# Altium PCB WiirdFlex Bottom Alignment.PcbDoc
Units mm, origin at the board's own origin, x right, y up, seen from the top; angles counter-clockwise.
Board outline 74.5 x 98.5 mm, 2 copper layers (Top Layer, Bottom Layer); 21 components, 14 nets, 169 pads, 0 vias.
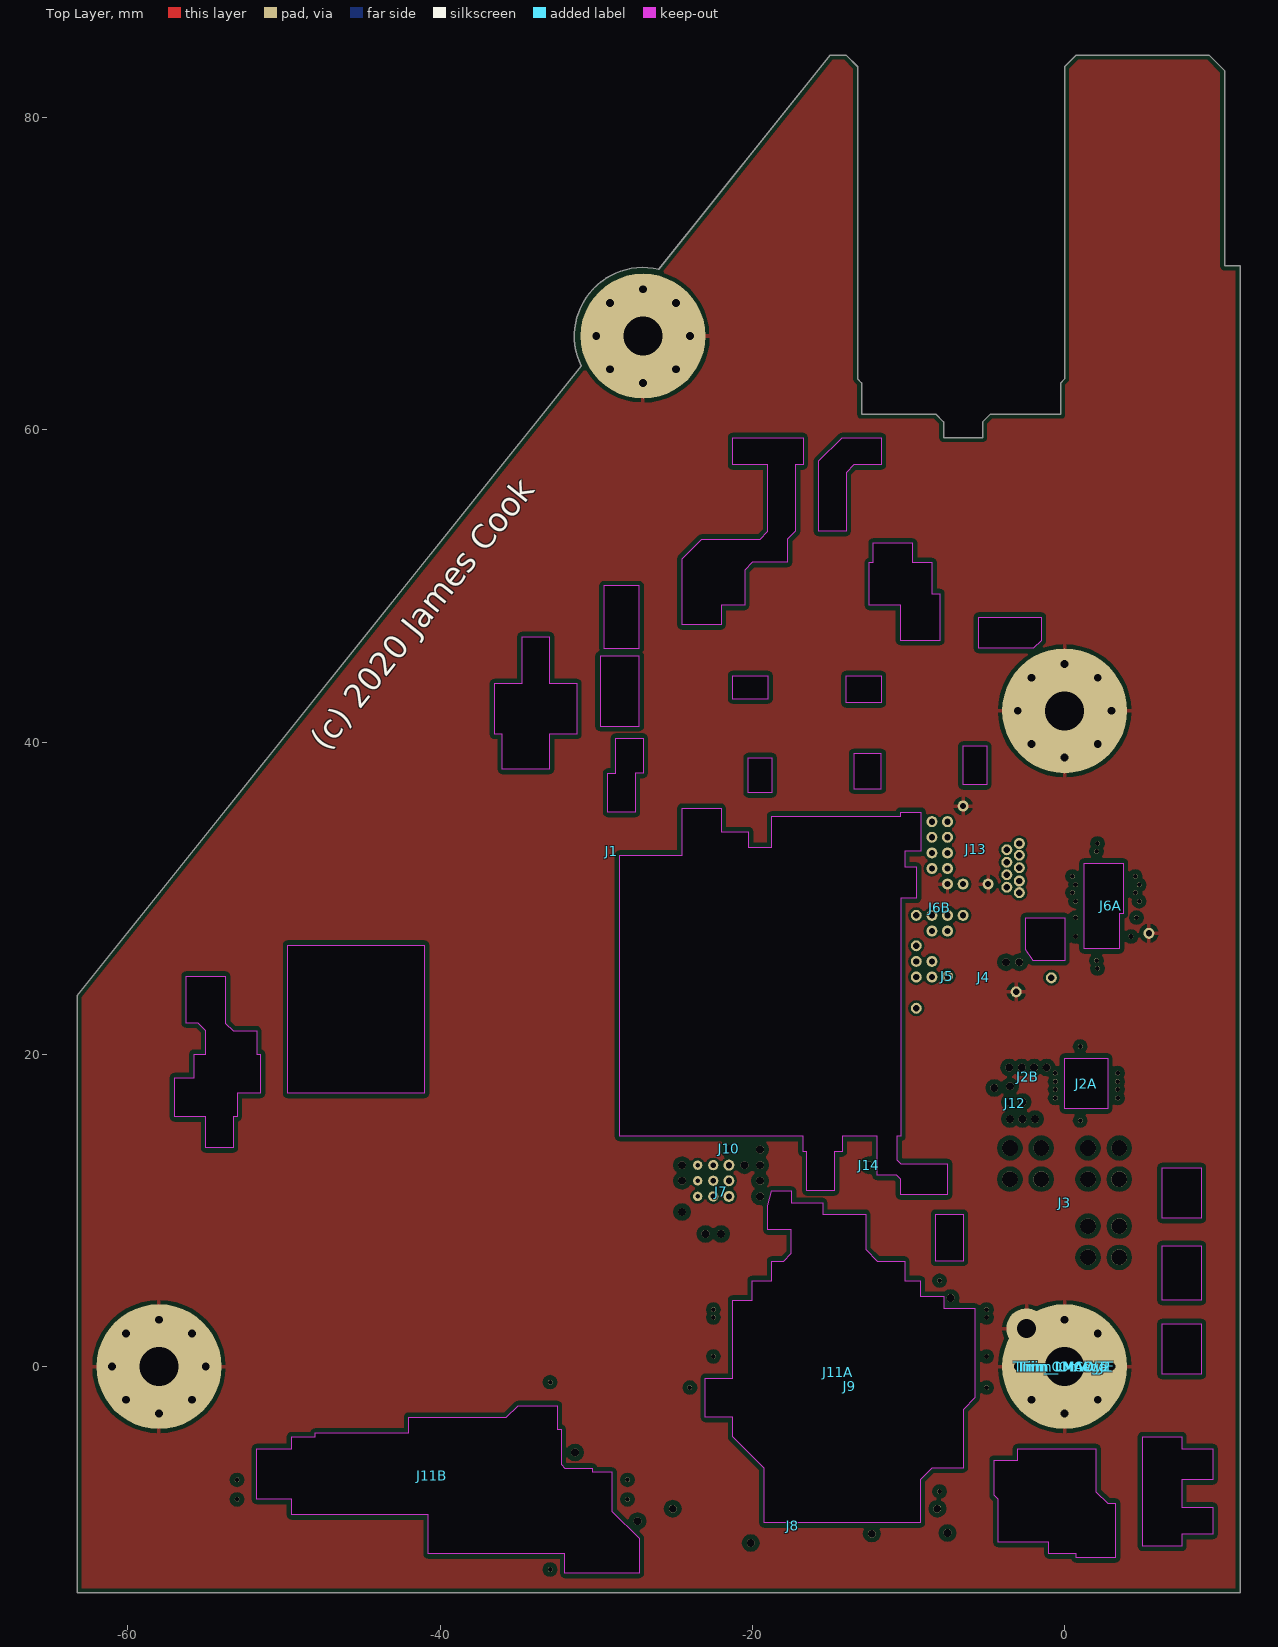
[diagram p0: Top Layer view]
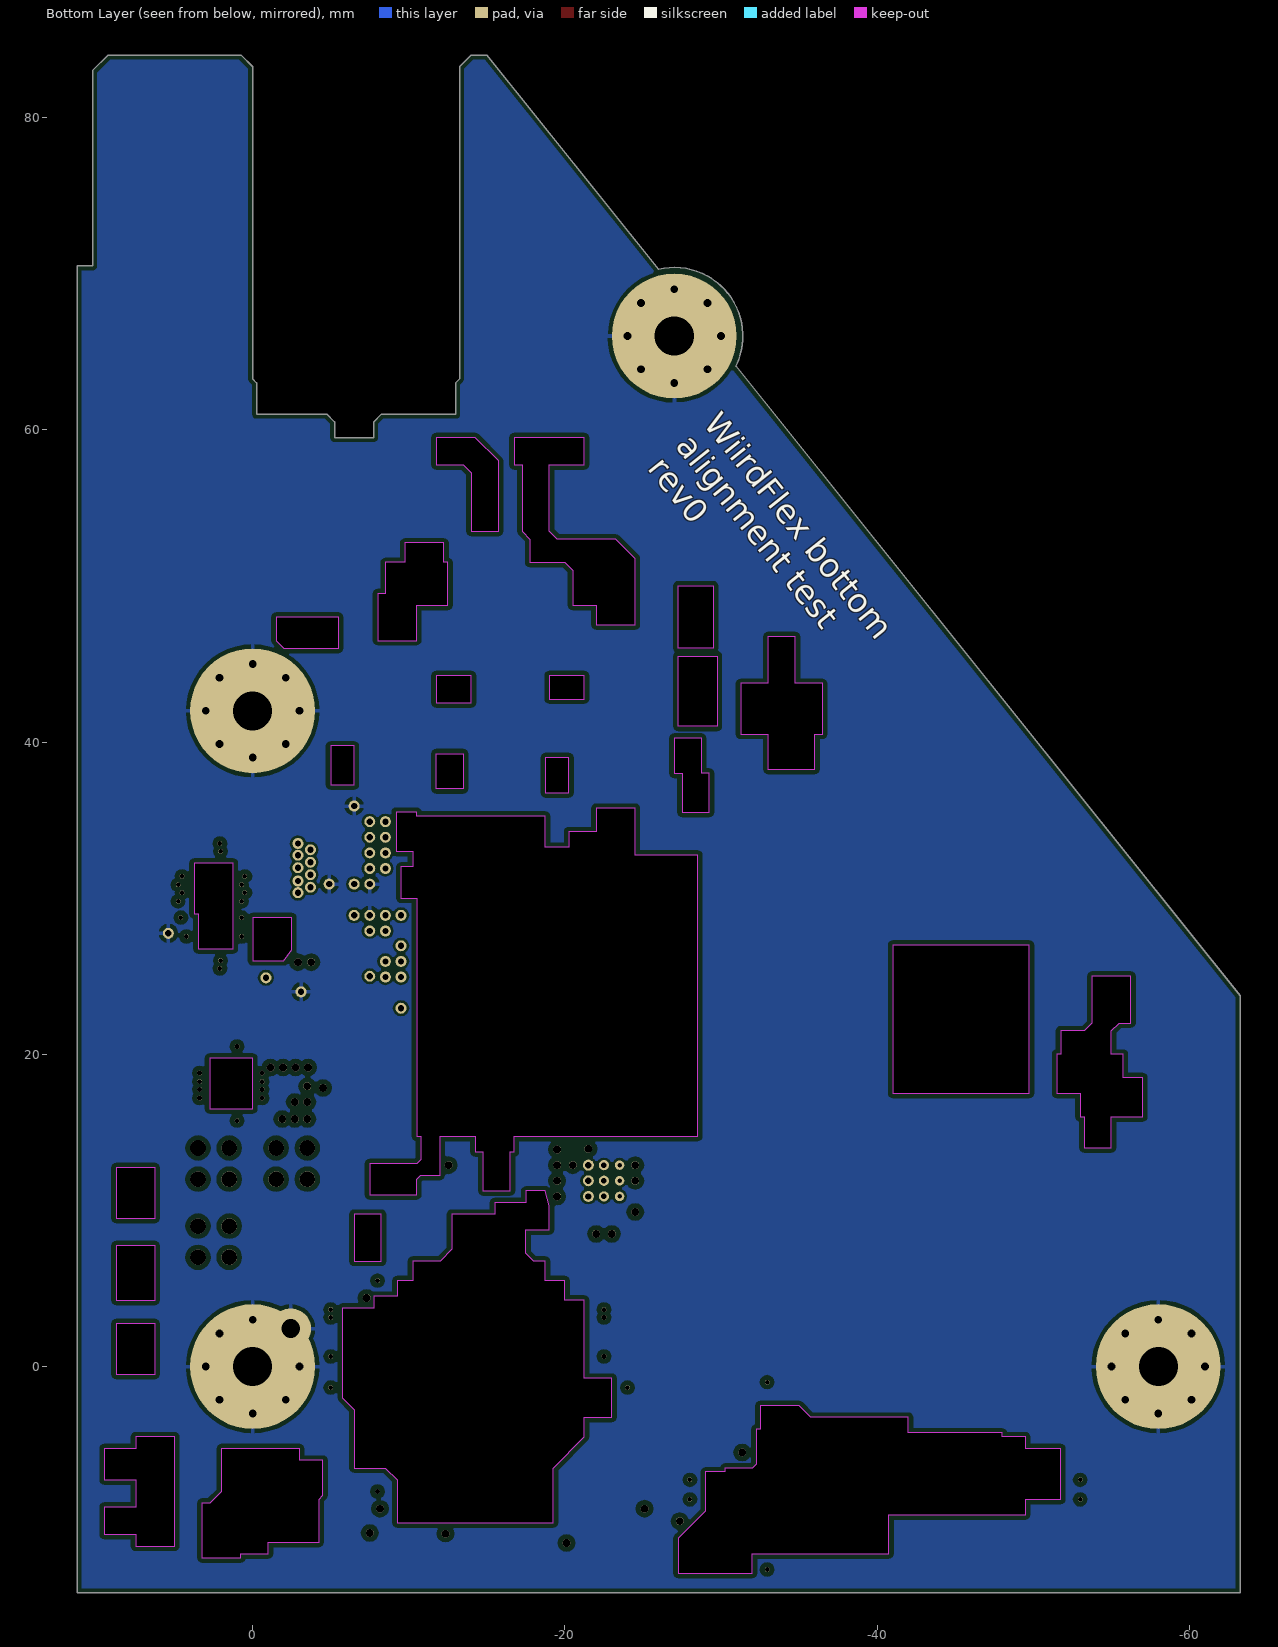
[diagram p1: Bottom Layer view, seen from below]

## Layer stack, top to bottom
Top Solder: solder mask 0.0102, Solder Resist, Dk 3.5
Top Layer: signal copper 0.0356
Dielectric 1: dielectric 0.32, FR-4, Dk 4.8
Bottom Layer: signal copper 0.0356
Bottom Solder: solder mask 0.0102, Solder Resist, Dk 3.5

## Board outline
-63.25,-14.5 -63.25,23.75 -30.953,64.079 cw(c-27,66) -25.993,70.279 -25.99,70.276 -15,84 -14,84 -13.25,83.25 -13.25,63.25 -13,63 -13,61 -8.25,61 -7.75,60.5 -7.75,59.5 -5.25,59.5 -5.25,60.5 -4.75,61 -0.25,61 -0.25,63 0,63.25 0,83.25 0.75,84 9.25,84 10.25,83 10.25,70.5 11.25,70.5 11.25,-14.5
cut-out: 6.25,2.75 8.75,2.75 8.75,-0.5 6.25,-0.5
cut-out: 6.25,7.75 8.75,7.75 8.75,4.25 6.25,4.25
cut-out: 6.25,12.75 8.75,12.75 8.75,9.5 6.25,9.5
cut-out: -4.5,-6 -3,-6 -3,-5.25 2,-5.25 2,-8 2.75,-8.75 3.25,-8.75 3.25,-12.25 0.75,-12.25 0.75,-12 -1,-12 -1,-11.25 -4.25,-11.25 -4.25,-8.5 -4.5,-8.25
cut-out: -27.25,46 -27.25,50 -29.5,50 -29.5,46
cut-out: -56.25,25 -53.75,25 -53.75,22 -53.25,21.5 -51.75,21.5 -51.75,20 -51.5,20 -51.5,17.5 -53,17.5 -53,16 -53.25,16 -53.25,14 -55,14 -55,16 -57,16 -57,18.5 -55.75,18.5 -55.75,20 -55,20 -55,21.5 -55.5,22 -56.25,22
cut-out: -49.75,27 -41,27 -41,17.5 -49.75,17.5
cut-out: -34.75,46.75 -33,46.75 -33,43.75 -31.25,43.75 -31.25,40.5 -33,40.5 -33,38.25 -36,38.25 -36,40.5 -36.5,40.5 -36.5,43.75 -34.75,43.75
cut-out: -29.75,45.5 -29.75,41 -27.25,41 -27.25,45.5
cut-out: -29.25,35.5 -29.25,38 -28.75,38 -28.75,40.25 -27,40.25 -27,38 -27.5,38 -27.5,35.5
cut-out: -20.25,39 -18.75,39 -18.75,36.75 -20.25,36.75
cut-out: -13.5,39.25 -13.5,37 -11.75,37 -11.75,39.25
cut-out: -14,44.25 -11.75,44.25 -11.75,42.5 -14,42.5
cut-out: -21.25,44.25 -19,44.25 -19,42.75 -21.25,42.75
cut-out: -21.25,59.5 -16.75,59.5 -16.75,57.75 -17.25,57.75 -17.25,53.5 -17.75,53 -17.75,51.5 -20,51.5 -20.5,51 -20.5,48.75 -22,48.75 -22,47.5 -24.5,47.5 -24.5,51.75 -23.25,53 -19.5,53 -19,53.5 -19,57.75 -21.25,57.75
cut-out: -15.75,53.5 -15.75,58 -14.25,59.5 -11.75,59.5 -11.75,57.75 -13.5,57.75 -14,57.25 -14,53.5
cut-out: -12.25,52.75 -9.75,52.75 -9.75,51.5 -8.5,51.5 -8.5,49.5 -8,49.5 -8,46.5 -10.5,46.5 -10.5,48.75 -12.5,48.75 -12.5,51.5 -12.25,51.5
cut-out: -5.5,48 -1.5,48 -1.5,46.5 -2,46 -5.5,46
cut-out: -8.25,9.75 -6.5,9.75 -6.5,6.75 -8.25,6.75
cut-out: -10.5,35.5 -9.2,35.5 -9.2,33 -10.25,33 -10.25,32 -9.5,32 -9.5,30 -10.5,30 -10.5,14.75 -10.75,14.75 -10.75,13.25 -10.5,13 -7.5,13 -7.5,11 -10.5,11 -10.5,12 -10.75,12.25 -12,12.25 -12,14.75 -14.25,14.75 -14.25,13.75 -14.75,13.75 -14.75,11.25 -16.5,11.25 -16.5,13.75 -16.75,13.75 -16.75,14.75 -28.5,14.75 -28.5,32.75 -24.5,32.75 -24.5,35.75 -22,35.75 -22,34.25 -20.25,34.25 -20.25,33.25 -18.75,33.25 -18.75,35.25 -10.5,35.25
cut-out: -6.5,39.75 -5,39.75 -5,37.25 -6.5,37.25
cut-out: 1.25,26.75 1.25,32.25 3.75,32.25 3.75,29 3.5,29 3.5,26.75
cut-out: -2.5,28.75 0,28.75 0,26 -2,26 -2.5,26.7
cut-out: 0,19.75 2.75,19.75 2.75,16.5 0,16.5
cut-out: 5,-4.5 7.5,-4.5 7.5,-5.25 9.5,-5.25 9.5,-7.25 7.5,-7.25 7.5,-9 9.5,-9 9.5,-10.75 7.5,-10.75 7.5,-11.5 5,-11.5
cut-out: -23,-3.25 -23,-0.75 -21.25,-0.75 -21.25,4.25 -20,4.25 -20,5.5 -18.75,5.5 -18.75,6.75 -18,6.75 -17.5,7.25 -17.5,8.75 -19,8.75 -19,10.3 -18.75,11.25 -17.5,11.25 -17.5,10.5 -15.5,10.5 -15.5,9.75 -12.75,9.75 -12.75,7.5 -12,6.75 -10.25,6.75 -10.25,5.5 -9.25,5.5 -9.25,4.5 -7.75,4.5 -7.75,3.75 -5.75,3.75 -5.75,-2 -6.5,-2.75 -6.5,-6.5 -8.5,-6.5 -9.25,-7.25 -9.25,-10 -19.25,-10 -19.25,-6.5 -21.25,-4.5 -21.25,-3.25
cut-out: -51.75,-8.5 -51.75,-5.25 -49.5,-5.25 -49.5,-4.5 -48,-4.5 -48,-4.25 -42,-4.25 -42,-3.25 -35.75,-3.25 -35,-2.5 -32.5,-2.5 -32.5,-4 -32.25,-4 -32.25,-6.25 -32,-6.5 -30.25,-6.5 -30.25,-6.75 -29,-6.75 -29,-9.25 -27.25,-11 -27.25,-13.25 -32,-13.25 -32,-12 -40.75,-12 -40.75,-9.5 -49.5,-9.5 -49.5,-8.5

## Design rules (kind name [scope] priority, off if disabled: settings)
BoardOutlineClearance [All] p1: gap=0.3 ignorepadtopadclearanceinfootprint=FALSE
Clearance [All] p1: gap=0.152 ignorepadtopadclearanceinfootprint=FALSE except(0.305: Arc-Via Track-Via SMDPad-Via THPad-Via Via-Fill Via-Poly Via-Region Fill-Hole Poly-Hole Region-Hole)
ComponentClearance [All] p1: gap=0 collisioncheckmode=3 verticalgap=0 showdistances=FALSE
HoleToHoleClearance [All] p1: gap=0.152 allowstackedmicrovias=TRUE
MinimumAnnularRing [All] p1: minimumring=0.152
MinimumSolderMaskSliver [All] p1 off: minsoldermaskwidth=0.32
PolygonConnect [All] p1: connectstyle=Relief reliefconductorwidth=0.254 reliefentries=4 polygonreliefangle="90 Angle" airgapwidth=0.254
RoutingVias [All] p1: holewidth=0.711 width=1.27 viastyle="Through Hole" minholewidth=0.711 minwidth=1.27 maxholewidth=0.711 maxwidth=1.27
SolderMaskExpansion [All] p1: expansion=0.102 istentingtop=FALSE
Width [All] p1: maxlimit=0.254 minlimit=0.152 preferedwidth=0.152
27 further rules are at their usual default settings.

## Components (designator, comment, footprint, x,y, rotation, side; value= is the part's Value field where it differs from the comment)
J1 "RVK-1_Ground_MountingScrews" "RVK-1_GND_SCREWS - BOTTOM ALIGNMENT BOARD" 0,0 r0 top
J2A "RVK-1_GameCube_Ports" "RVK-1_GC_CONTROLLER_RPADS - ALIGNMENT" 0,0 r0 top
J2B "RVK-1_GameCube_Ports" "RVK-1_GC_CONTROLLER_VIAS - ALIGNMENT" 0,0 r0 top
J3 "RVK-1_GameCube_MemoryCards" "RVK-1_MEMCARD_TESTPOINTS - ALIGNMENT" 0,0 r0 top
J4 "RVK-1_MX_Relocation" "RVK-1_MX - ALIGNMENT" 0,0 r0 top
J5 "RVK-1_Reset" "RVK-1_RESET - ALIGNMENT" 0,0 r0 top
J6A "RVK-1_WiFi" "RVK-1_WIFI_RPADS - ALIGNMENT" 0,0 r0 top
J6B "RVK-1_WiFi" "RVK-1_WIFI_VIAS - ALIGNMENT" 0,0 r0 top locked
J7 "RVK-1_AVE_Relocation" "RVK-1_AVE_VIAS - ALIGNMENT" 0,0 r0 top
J8 "RVK-1_Video" "RVK-1_VIDEO_VIAS - ALIGNMENT" 0,0 r0 top
J9 "RVK-1_Video_Sync" "RVK-1_VIDEO_SYNC - ALIGNMENT" 0,0 r0 top
J10 "RVK-1_Video_Mode" "RVK-1_VIDEO_MODE_VIA - ALIGNMENT" 0,0 r0 top
J11A "RVK-1_Audio" "RVK-1_AVE_AUDIO_OUT - ALIGNMENT" 0,0 r0 top
J11B "RVK-1_Audio" "RVK-1_AUDIO_PREAMP_PADS - ALIGNMENT" 0,0 r0 top
J12 "RVK-1_TestPoints" "RVK-1_TESTPOINT_VIAS - ALIGNMENT" 0,0 r0 top
J13 "RVK-1_NAND_Relocation" "RVK-1_NAND_VIAS - ALIGNMENT" 0,0 r0 top
J14 "RVK-1_Fan" "RVK-1_FAN_PWM - ALIGNMENT" 0,0 r0 top
Trim_LMAO_JL "Misc" "WII TRIM: LMAO WITH EXTRA MOUNTING HOLE" 0,0 r0 top locked
Trim_LMAOv2 "Misc" "WII TRIM: LMAOV2" 0,0 r0 top locked
Trim_Omega "Comment" "WII TRIM: OMEGA" 0,0 r0 top locked
Trim_OMGWTF "Misc" "WII TRIM: OMGWTF" 0,0 r0 top locked

## Footprints (in the part's own frame and the unit in brackets; to place one, negate y for a bottom-side part, rotate by r counter-clockwise, add the part's x,y. Pads: shape width x height; smd on the part's side, far side on the other; paste and mask are expansions set on the pad)
"RVK-1_AUDIO_PREAMP_PADS - ALIGNMENT" [mm]
  round 0.3 hole 0.3 unplated: 1(-53,-8.5) 1(-32.95,-13) 1(-32.95,-1) 1(-28,-8.5) 2(-53,-7.25) 2(-28,-7.25)
  round 0.5 hole 0.5 unplated: G(-31.35,-5.5)
"RVK-1_AVE_AUDIO_OUT - ALIGNMENT" [mm]
  round 0.3 hole 0.3 unplated: 1(-24,-1.35) 1(-5,-1.35) 2(-22.5,0.65) 2(-5,0.65)
"RVK-1_AVE_VIAS - ALIGNMENT" [mm]
  round 0.5 hole 0.5 unplated: 1(-24.5,11.9) 20(-20.5,12.9) 25(-19.5,12.9) 27(-19.5,10.9) 29(-19.5,11.9) 31(-19.5,13.9) 64(-24.5,9.9) G(-24.5,12.9) G(-23,8.5) G(-22,8.5)
  round 0.605 hole 0.3: 2(-23.5,12.9) 3(-23.5,10.9) 6(-23.5,11.9)
  round 0.655 hole 0.35: 7(-22.5,12.9) 8(-22.5,10.9) 11(-22.5,11.9)
  round 0.705 hole 0.4 unplated: 13(-21.5,12.9) 14(-21.5,10.9) 19(-21.5,11.9)
"RVK-1_FAN_PWM - ALIGNMENT" [mm] "Via controlling fan from GPU.  Don't know if it's actually PWM or not, just guessing."
  round 0.5 hole 0.5 unplated: 1(-12.55,12.9)
"RVK-1_GC_CONTROLLER_RPADS - ALIGNMENT" [mm]
  round 0.3 hole 0.3 unplated: 1(-0.6,18.25) 1(3.4,18.25) 2(-0.6,18.8) 2(3.4,18.8) 3(-0.6,17.75) 3(3.4,17.75) 4(-0.6,17.2) 4(3.4,17.2) G(1,15.75) G(1,20.5)
"RVK-1_GC_CONTROLLER_VIAS - ALIGNMENT" [mm]
  round 0.5 hole 0.5 unplated: 1(-1.95,19.15) 2(-1.15,19.15) 3(-2.75,19.15) 4(-3.55,19.15) G(-3.5,17.95)
"RVK-1_GND_SCREWS - BOTTOM ALIGNMENT BOARD" [mm]
  round 1 hole 0.5: 1(-61,0) 1(-60.121,-2.121) 1(-60.121,2.121) 1(-58,-3) 1(-58,3) 1(-55.879,-2.121) 1(-55.879,2.121) 1(-55,0) 1(-30,66) 1(-29.121,63.879) 1(-29.121,68.121) 1(-27,63) 1(-27,69) 1(-24.879,63.879) 1(-24.879,68.121) 1(-24,66) 1(-3,0) 1(-3,42) 1(-2.121,-2.121) 1(-2.121,39.879) 1(-2.121,44.121) 1(0,-3) 1(0,3) 1(0,39) 1(0,45) 1(2.121,-2.121) 1(2.121,2.121) 1(2.121,39.879) 1(2.121,44.121) 1(3,0) 1(3,42)
  round 8 hole 2.5: 1(-58,0) 1(-27,66) 1(0,0) 1(0,42)
  round 2.6 hole 1.2: 1(-2.432,2.432)
"RVK-1_MEMCARD_TESTPOINTS - ALIGNMENT" [mm] "Don't need these signals but they may be useful for mechanical attachment points"
  round 1 hole 1 unplated: 1(-3.5,14) 2(-1.5,14) 3(1.5,14) 4(3.5,14) 5(-3.5,12) 6(-1.5,12) 7(1.5,12) 8(3.5,12) 9(1.5,9) 10(3.5,9) 11(1.5,7) 12(3.5,7)
"RVK-1_MX - ALIGNMENT" [mm] "Vias where the MX chip attaches to CPU and/or GPU on the bottom of a 4-layer Wii motherboard"
  round 0.705 hole 0.4: 5(-0.85,24.9) 7(-9.5,25.95) 11(-8.5,25.95) 14(-9.5,26.95) 15(-9.5,22.95) 20(-9.5,24.95) 24(-8.5,24.95) G(-3.1,24)
  round 0.5 hole 0.5 unplated: 12(-2.9,25.9) 13(-3.75,25.9)
"RVK-1_NAND_VIAS - ALIGNMENT" [mm]
  round 0.705 hole 0.4: 6(-2.9,30.35) 7(-3.7,30.7) 8(-2.9,31.1) 9(-3.7,31.5) 10(-2.9,31.95) 16(-3.7,32.3) 17(-2.9,32.75) 18(-3.7,33.1) 19(-2.9,33.5) 29(-8.5,34.9) 30(-7.5,34.9) 31(-8.5,33.9) 32(-7.5,33.9) 41(-8.5,32.9) 42(-7.5,32.9) 43(-8.5,31.9) 44(-7.5,31.9) G(-7.5,30.9) G(-6.5,35.9) G(-4.9,30.9)
"RVK-1_RESET - ALIGNMENT" [mm]
  round 0.705 hole 0.4: 1(-7.5,25)
"RVK-1_TESTPOINT_VIAS - ALIGNMENT" [mm] "Vias near GPU associated with some test points on top layer"
  round 0.5 hole 0.5 unplated: 219(-2.7,16.95) 220(-4.5,17.85) 221(-3.5,16.95) 223(-3.5,15.85) 224(-2.7,15.85) 225(-1.9,15.85)
"RVK-1_VIDEO_MODE_VIA - ALIGNMENT" [mm]
  round 0.5 hole 0.5 unplated: 1(-21.5,13.95)
"RVK-1_VIDEO_SYNC - ALIGNMENT" [mm]
  round 0.3 hole 0.3 unplated: 1(-22.5,3.65) 1(-8,-8) 1(-8,5.5) 1(-5,3.65) 2(-22.5,3.15) 2(-5,3.15)
  round 0.5 hole 0.5 unplated: G(-7.3,4.4)
"RVK-1_VIDEO_VIAS - ALIGNMENT" [mm]
  round 0.5 hole 0.5 unplated: 3(-7.5,-10.65) 7(-12.35,-10.7) 9(-20.1,-11.3) 11(-27.35,-9.9) G(-25.1,-9.1) G(-8.15,-9.1)
"RVK-1_WIFI_RPADS - ALIGNMENT" [mm]
  round 0.3 hole 0.3 unplated: 2(0.5,31.4) 2(2.05,26) 2(2.05,33) 2(4.525,31.4) 3(0.7,30.85) 3(4.775,30.85) 5(0.5,30.35) 5(4.525,30.35) 16(0.7,27.55) 16(4.25,27.55) 17(0.7,28.75) 17(2.1,25.5) 17(2.1,33.5) 17(4.6,28.75) 19(0.7,29.8) 19(4.775,29.8)
  round 0.705 hole 0.4: G(5.4,27.75)
"RVK-1_WIFI_VIAS - ALIGNMENT" [mm]
  round 0.705 hole 0.4: 2(-6.5,30.9) 3(-9.5,28.9) 5(-8.5,28.9) 16(-7.5,27.9) 17(-8.5,27.9) 19(-6.5,28.9) G(-7.5,28.9)
"WII TRIM: LMAO WITH EXTRA MOUNTING HOLE" [mm] "LMAO trim outline, from jefflongo's worklog at https://bitbuilt.net/forums/index.php?threads/wii-pocket.2709/"
"WII TRIM: LMAOV2" [mm] "LMAO v2 trim outline, from ShockSlayer's guide at https://bitbuilt.net/forums/index.php?threads/lmaov2-and-nand-relocation-guide.1961/"
"WII TRIM: OMEGA" [mm] "Omega trim outline, from images in ShockSlayer's post: https://bitbuilt.net/forums/index.php?threads/a-very-merwii-christmas.864/"
"WII TRIM: OMGWTF" [mm] "OMGWTF trim outline, from ShockSlayer's guide at https://bitbuilt.net/forums/index.php?threads/lmaov2-and-nand-relocation-guide.1961/"

## Part data
Trim_LMAO_JL Trim_LMAOv2 Trim_OMGWTF: "placeholder for footprints without pads - keepouts, trim outlines, etc", ClassName=Keepout

## Nets (pads, with @x,y where several pads share a name; then routed paths per layer and width w, separated by ;. In a path a pad name is that pad's centre, name@x,y a point inside that pad or via, vN(x,y) a via of type N, cw(c..) or ccw(c..) an arc to the next point about the centre after c; other vN are vias at no path point)
GND: J1.1 J4.G J6A.G J6B.G J13.G
MX_5: J4.5
MX_7: J4.7
MX_11: J4.11
MX_14: J4.14
MX_15: J4.15
MX_20: J4.20
MX_24: J4.24
WIFI_2: J6B.2
WIFI_3: J6B.3
WIFI_5: J6B.5
WIFI_16: J6B.16
WIFI_17: J6B.17
WIFI_19: J6B.19
pads on no net: J2A.1 J2A.2 J2A.3 J2A.4 J2A.G J2B.1 J2B.2 J2B.3 J2B.4 J2B.G J3.1 J3.2 J3.3 J3.4 J3.5 J3.6 J3.7 J3.8 J3.9 J3.10 J3.11 J3.12 J4.12 J4.13 J5.1 J6A.2 J6A.3 J6A.5 J6A.16 J6A.17 J6A.19 J7.1 J7.2 J7.3 J7.6 J7.7 J7.8 J7.11 J7.13 J7.14 J7.19 J7.20 J7.25 J7.27 J7.29 J7.31 J7.64 J7.G J8.3 J8.7 J8.9 J8.11 J8.G J9.1 J9.2 J9.G J10.1 J11A.1 J11A.2 J11B.1 J11B.2 J11B.G J12.219 J12.220 J12.221 J12.223 J12.224 J12.225 J13.6 J13.7 J13.8 J13.9 J13.10 J13.16 J13.17 J13.18 J13.19 J13.29 J13.30 J13.31 J13.32 J13.41 J13.42 J13.43 J13.44 J14.1

## Polygon pours and split planes (outlines as drawn)
GND on Top Layer "GND_L01_P000" (solid, remove dead copper, pour order 0): -63.25,-14.5 11.25,-14.5 11.25,84 -15,84 -27.75,71.25 -30.25,71.25 -33.5,68 -33.5,65 -63.25,35.25
GND on Bottom Layer "GND_L02_P001" (solid, remove dead copper, pour order 1): 11.25,84 -15,84 -27.75,71.25 -30.25,71.25 -33.5,68 -33.5,65 -63.25,35.25 -63.25,-14.5 11.25,-14.5

## Silkscreen, mask and mechanical layers (free items; w line width, h text height)
Top Overlay:
  text "(c) 2020 James Cook" at -47.29,39.357 h1.52 r51.35
Bottom Overlay:
  text "WiirdFlex bottom / alignment test / rev0" at -25.25,57.5 h1.52 r51.35
Board Edge:
  drawing of 306 lines, arcs and shapes, not listed